# EAGLE board os31_master (EAGLE 7.7.0)
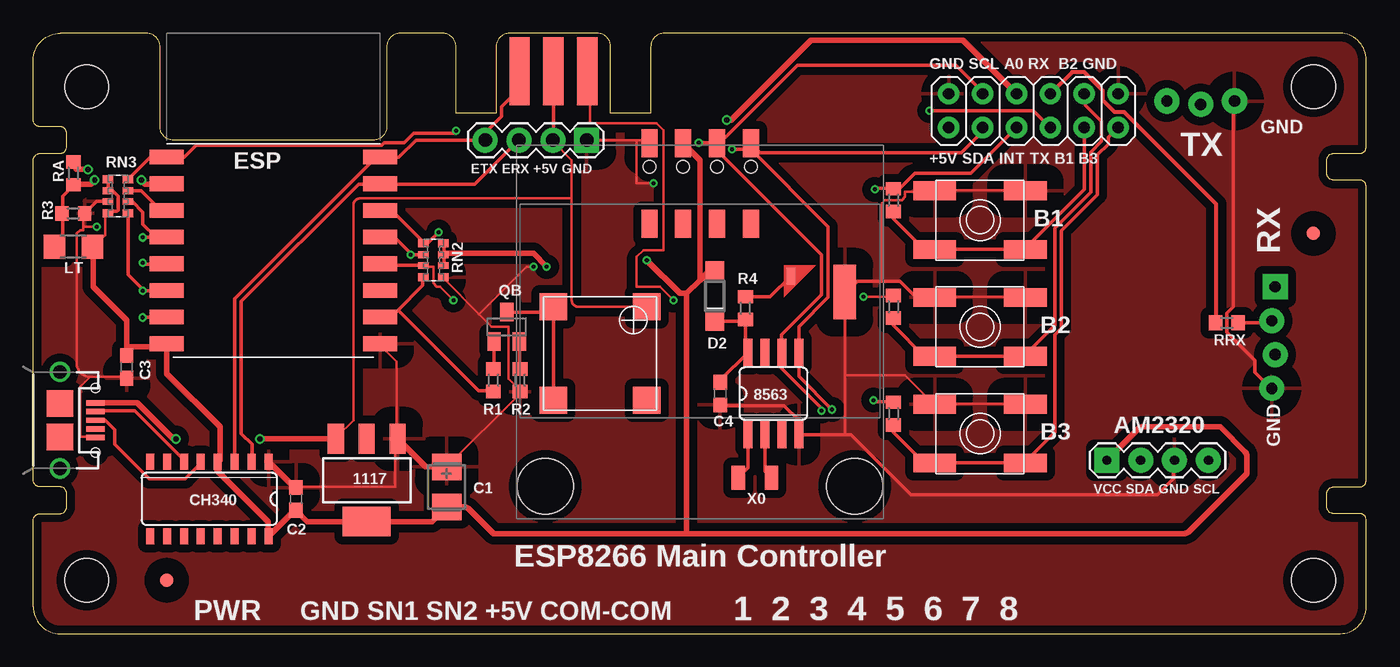
[diagram p0: board, top side]
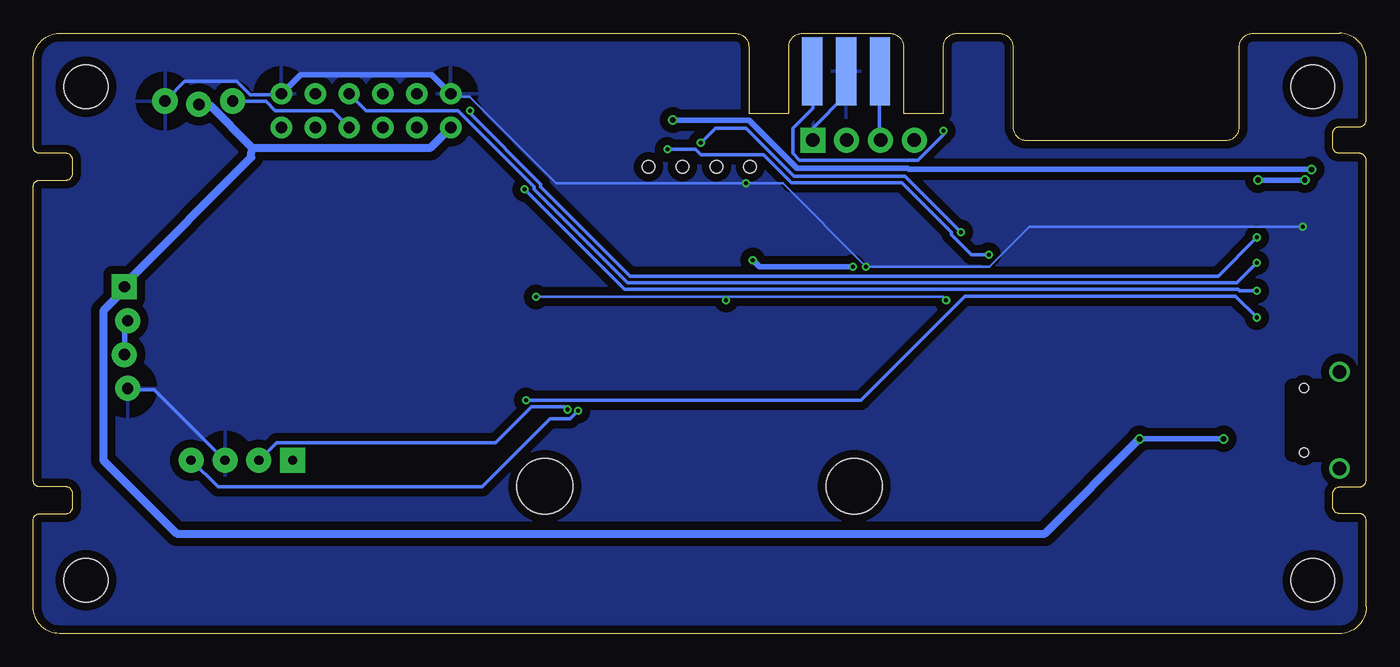
[diagram p1: board, bottom side, seen from below]

Size 99.95 x 45 mm. Coordinates in mm from the lower left corner, seen from the top.
Outline: 2,0 98,0 arc90 99.95,2 99.95,8.5 arc90 99.5,9 97.5,9 arc-90 97,9.5 97,10.5 arc-90 97.5,11 99.5,11 arc90 99.95,11.5 99.95,33.5 arc90 99.5,34 97.5,34 arc-90 97,34.5 97,35.5 arc-90 97.5,36 99.5,36 arc90 99.95,36.5 99.95,43 arc90 98,45 47.3,45 arc90 46.3,44 46.3,39 43.3,39 43.3,44 arc90 42.3,45 35.7,45 arc90 34.7,44 34.7,39 31.7,39 31.7,44 arc90 30.7,45 27.5,45 arc90 26.5,44 26.5,38 arc-90 25.5,37 10.5,37 arc-90 9.5,38 9.5,44 arc90 8.5,45 2,45 arc90 0,43 0,38.5 arc90 0.5,38 2,38 arc-90 2.5,37.5 2.5,36.5 arc-90 2,36 0.5,36 arc90 0,35.5 0,11.5 arc90 0.5,11 2,11 arc-90 2.5,10.5 2.5,9.5 arc-90 2,9 0.5,9 arc90 0,8.5 0,2 arc90 2,0
Copper layers (1*16): Top 0.035mm / dielectric 1.5mm / Bottom 0.035mm
Design rules "Fusion_eagle_rule_v1.1 *": minimum track width 6mil, minimum drill 12mil, track to track 6mil, track to pad 6mil, pad to pad 6mil, via to via 6mil, smd to smd 0mil, copper to edge 10mil, drill to drill 10mil, minimum pad ring 10mil, minimum via ring 6mil, stop-mask expansion 2mil, vias tented up to drill 100mil, thermal gap 50mil
Net classes: 0 default: width 0.203 mm, clearance 0.178 mm; 1 power: width 0.203 mm, clearance 0.178 mm; 2 relaypower: width 0.203 mm, clearance 0.178 mm; 3 signal: width 0.203 mm, clearance 0.178 mm; 4 adc: width 0.406 mm, clearance 0.178 mm
Holes 3.3 mm at 4,4 96,4 4,41 96,41
bRestrict: area 3.5,13.5 to 5.5,18.5
vRestrict: area 11,20.5 to 25,36.5

## Footprints (pad centres in the part's own frame; a part is rotated, then mirrored left to right if it is on the bottom)
FIDUCIAL_1MM = smd 1 x 1: 1 0,0
SOT223 = smd 1.219 x 2.235: 1 -2.311,-3.099; 2 0,-3.099; 3 2.311,-3.099 | smd 3.6 x 2.2: 4 0,3.099
SO08 = smd 0.66 x 2.032: 1 -1.905,-3.073; 2 -0.635,-3.073; 3 0.635,-3.073; 4 1.905,-3.073; 5 1.905,3.073; 6 0.635,3.073; 7 -0.635,3.073; 8 -1.905,3.073
1X04-NARROW = drill 0.7 pad 1.88 square: 1 0,0 | drill 0.7 pad 1.88: 2 2.54,0; 3 5.08,0; 4 7.62,0
EVQ-Q2 = smd 3.2 x 1.4: 1 -3.4,-2.2; 2 3.4,-2.2; 3 -3.4,2.2; 4 3.4,2.2
BATTCON_XH414 = smd 4.1 x 1.7: P$1 0.7,-1.85 | smd 1.27 x 0.635: P$2 1.9,2.2
SMT-8585-BUZZER = smd 2.05 x 2.05: + -3.5,-3.5; - 3.5,-3.5; A- 3.5,3.5; NC1 -3.5,3.5
CT3528 = smd 2 x 2.2: + -1.5,0; - 1.5,0
C0603 = smd 1.1 x 1: 1 -0.85,0; 2 0.85,0
SO16 = smd 0.6 x 1.2: 1 -4.445,-2.8; 2 -3.175,-2.8; 3 -1.905,-2.8; 4 -0.635,-2.8; 5 0.635,-2.8; 6 1.905,-2.8; 7 3.175,-2.8; 8 4.445,-2.8; 9 4.445,2.8; 10 3.175,2.8; 11 1.905,2.8; 12 0.635,2.8; 13 -0.635,2.8; 14 -1.905,2.8; 15 -3.175,2.8; 16 -4.445,2.8
SOD123 = smd 1.4 x 1.4: A 1.9,0; C -1.9,0
ESP12_WES = smd 2.54 x 1.1: 0 8,-3.27; 2 8,-5.27; 4 8,0.73; 5 8,-1.27; 12 -8,-5.27; 13 -8,-7.27; 14 -8,-3.27; 15 8,-7.27; 16 -8,-1.27; ADC -8,2.73; EN -8,0.73; GND 8,-9.27; RST -8,4.73; RX 8,2.73; TX 8,4.73; VCC -8,-9.27
2X06 = drill 0.85 pad 1.6: 1 -6.35,-1.27; 2 -6.35,1.27; 3 -3.81,-1.27; 4 -3.81,1.27; 5 -1.27,-1.27; 6 -1.27,1.27; 7 1.27,-1.27; 8 1.27,1.27; 9 3.81,-1.27; 10 3.81,1.27; 11 6.35,-1.27; 12 6.35,1.27
1X04 = drill 1.016 pad 1.88 square: 1 0,0 | drill 1.016 pad 1.88: 2 2.54,0; 3 5.08,0; 4 7.62,0
SSD1306_OLED_I2C_SMD3 = smd 1.2 x 2.1: 1 -3.81,1.75; 1' -3.81,-4.29; 2 -1.27,1.75; 2' -1.27,-4.29; 3 1.27,1.75; 3' 1.27,-4.29; 4 3.81,1.75; 4' 3.81,-4.29 | hole 4.2: 11.6,-23.95; -11.6,-23.95 | hole 0.95: -3.81,-0.01; -1.27,-0.01; 1.27,-0.01; 3.81,-0.01
R1206 = smd 1.6 x 1.803: 1 -1.422,0; 2 1.422,0
SOT23 = smd 1 x 1.4: 1 -0.95,-1.1; 2 0.95,-1.1; 3 0,1.1
R0603 = smd 1 x 1.1: 1 -0.85,0; 2 0.85,0
EXB38V = smd 0.6 x 0.8: 1 -1.275,-0.75; 4 1.275,-0.75; 5 1.275,0.75; 8 -1.275,0.75 | smd 0.5 x 0.8: 2 -0.4,-0.75; 3 0.4,-0.75; 6 0.4,0.75; 7 -0.4,0.75
1X04_LOCK = drill 0.85 pad 1.88 square: 1 0,0.127 | drill 0.85 pad 1.88: 2 2.54,-0.127; 3 5.08,0.127; 4 7.62,-0.127
1X03_LOCK = drill 0.85 pad 1.88: 1 0,0.127; 2 2.54,-0.127; 3 5.08,0.127
GOLDFINGER_2X3 = smd 1.524 x 5.08: 1 -2.54,-2.54; 2 0,-2.54; 3 2.54,-2.54 | smd 1.524 x 5.08 bottom: 4 -2.54,-2.54; 5 0,-2.54; 6 2.54,-2.54
USB-MICROB2 = smd 0.4 x 1.4: D+ 0,2.65; D- -0.65,2.65; GND 1.3,2.65; ID 0.65,2.65; VBUS -1.3,2.65 | drill 1: MT1 -3.625,0; MT2 3.625,0 | smd 2 x 2: MT3 1.25,0; MT4 -1.25,0 | hole 0.7: -2.425,2.65; 2.425,2.65
MM20SS1 = smd 1.8 x 1: 1 0,-1.25; 4 0,1.25

## Placement (x,y rotation side)
1F  FIDUCIAL  [FIDUCIAL_1MM]  96,30 0 top
2F  FIDUCIAL  [FIDUCIAL_1MM]  10,4 0 top
1117  BL1117-33  [SOT223]  25,11.5 180 top
8563  PCF8563  [SO08]  55.5,18 0 top
AM2320  [1X04-NARROW]  80.5,13 0 top
B1  SPST_TACTEVQQ2  [EVQ-Q2]  71,31 0 top
B2  SPST_TACTEVQQ2  [EVQ-Q2]  71,23 0 top
B3  SPST_TACTEVQQ2  [EVQ-Q2]  71,15 0 top
BAT  XH414  [BATTCON_XH414]  59,24.9 90 top
BUZ  BUZZER  [SMT-8585-BUZZER]  42.5,21 180 top
C1  100uF  [CT3528]  31,11 270 top
C2  0.1u  [C0603]  19.7,10.1 270 top
C3  0.1u  [C0603]  7,20 270 top
C4  0.1u  [C0603]  51.5,18 270 top
CH340  CH340C  [SO16]  13.2,10.1 180 top
D2  LL4148  [SOD123]  51.1,25.3 90 top
ESP  ESP-12N  [ESP12_WES]  18,31 0 top
JP1  M04X2  [2X06]  75,39.2 0 top
JP2  [1X04]  41.5,37 180 top
LCD  SSD1306_OLED_I2CSMD3  [SSD1306_OLED_I2C_SMD3]  50,35 0 top
LT  100K  [R1206]  3,29 0 top
QB  MMBT3904  [SOT23]  35.5,23 0 top
R1  1K  [R0603]  34.5,19 90 top
R2  10  [R0603]  36.5,19 90 top
R3  10K  [R0603]  3,31.5 0 top
R4  10K  [R0603]  53.4,24.4 270 top
RA  1  [R0603]  3,34.5 270 top
RB1  1  [R0603]  64.5,32.5 90 top
RB2  1  [R0603]  64.5,24.5 90 top
RB3  1  [R0603]  64.5,16.5 90 top
RN2  1Kx4  [EXB38V]  30,28 270 top
RN3  10Kx4  [EXB38V]  6.35,32.8 270 top
RRX  1K  [R0603]  89.5,23.3 180 top
RX  [1X04_LOCK]  93,26 270 top
TX  [1X03_LOCK]  85,39.8 0 top
U$3  GOLDFINGER_2X3  [GOLDFINGER_2X3]  39,44.7 0 top
USB  USBMICROB2  [USB-MICROB2]  2,16 270 top
X0  32.768kHz  [MM20SS1]  54.1,11.7 270 top

## Library data of the parts
1F 2F R1-R4 RA RRX = adafruitGood
1117 AM2320 RX TX = SparkFun
8563 BUZ C2-C4 = adafruit
B1-B3 = adafruit_3
BAT CH340 JP2 U$3 USB = SparkFunNew
C1 = resistor
D2 = diode
ESP = JeeParts
JP1 = pinhead
LCD LT RB1-RB3 = adafruit2013
QB = transistor-small-signal
RN2 RN3 = resistor-dil; OC_FARNELL: unknown; OC_NEWARK: unknown
X0 = crystal

## Nets
ADC: ESP.ADC LT.1 R3.1 RA.2
B1: B1.1 B1.2 JP1.9 RB1.1
B2: B2.1 B2.2 JP1.10 RB2.1
B3: B3.1 B3.2 JP1.11 RB3.1
D+: CH340.5 USB.D+
D-: CH340.6 USB.D-
EN: ESP.EN RN3.7
ERX: CH340.2 ESP.RX JP2.3 U$3.4
ETX: CH340.3 ESP.TX JP2.4 U$3.1
GND [power]: 1117.1 8563.4 AM2320.3 B1.3 B1.4 B2.3 B2.4 B3.3 B3.4 BAT.P$1 C1.+ C2.1 C3.2 C4.2 CH340.1 ESP.GND JP1.2 JP1.12 JP2.1 LCD.1 R2.1 R3.2 RN2.5 RN3.3 RX.4 TX.3 U$3.5 USB.GND
GPIO0: ESP.0 RB2.2 RN2.3 U$3.3
GPIO2: ESP.2
GPIO12: ESP.12 JP1.5 RB1.2 RN3.5
GPIO13: ESP.13 RB3.2
GPIO14: ESP.14 JP1.8 RRX.2
GPIO15: ESP.15 R1.1 RN2.4
GPIO16: ESP.16 JP1.7 RN3.6 TX.1
N$1: 8563.1 X0.1
N$2: BUZ.- BUZ.A- QB.3
N$7: QB.1 R1.2
N$8: QB.2 R2.2
N$9 [adc]: JP1.6 RA.1
N$11: 8563.8 C4.1 D2.C R4.2
N$26: RRX.1 RX.2 RX.3
N$30: 8563.2 X0.4
N$36: BAT.P$2 R4.1
RST: ESP.RST RN3.8 U$3.6
SCL: 8563.6 AM2320.4 ESP.4 JP1.4 LCD.3 RN2.1
SDA: 8563.5 AM2320.2 ESP.5 JP1.3 LCD.4 RN2.2
VBAT: 8563.3
VCC: 1117.4 AM2320.1 C1.- C2.2 C3.1 CH340.4 CH340.16 D2.A ESP.VCC LCD.2 LT.2 RN2.6 RN2.7 RN2.8 RN3.1 RN3.2 RN3.4
VIN: 1117.3 BUZ.+ JP1.1 JP2.2 RX.1 TX.2 U$3.2 USB.VBUS

## Tracks (layer width: path | path; a pad name or v marks a point on that pad's centre or on a via)
ADC  (via drill 0.41)
  Top 0.254: 2.2,31.5 2.2,32.8 3,33.6 RA.2 | 2.2,31.5 R3.1 | 2.2,31.5 2.2,29.62 LT.1
  Top 0.406: v8.1,34 8.4,33.7 10,33.7 ESP.ADC | v4.6,34 4.3,33.7 3.1,33.7 RA.2
  Bottom 0.406: v4.6,34 v8.1,34
B1
  Top 0.254: RB1.1 64.5,31.1 66.8,28.8 B1.1 B1.2 74.4,28.9 78.8,33.3 78.8,37.9 JP1.9
B2
  Top 0.254: RB2.1 64.5,23.1 66.8,20.8 B2.1 B2.2 74.4,20.9 76.6,23.1 76.6,30.4 79.3,33.1 79.3,36.1 80.1,36.9 80.1,38.4 78.9,39.6 78.9,40.4 JP1.10
B3
  Top 0.254: RB3.1 64.5,15.1 66.8,12.8 B3.1 B3.2 74.4,12.9 76.6,15.1 76.6,22.4 77.1,22.9 77.1,30.2 79.8,32.9 79.8,35.9 80.6,36.7 80.6,37.2 81.3,37.9 JP1.11
D+
  Top 0.254: USB.D+ 5.4,16 6.1,15.3 6.1,14.2 8.7,11.6 11.4,11.6 12.6,12.8 12.6,12.9 CH340.5
D-
  Top 0.254: CH340.6 11.3,13 7.6,16.7 4.7,16.7 USB.D-
EN
  Top 0.254: RN3.7 8.1,33.2 9.6,31.7 10,31.7 ESP.EN
ERX
  Top 0.254: CH340.2 16.4,12.9 16.4,14.2 15.6,15 15.6,24.9 24.4,33.7 26,33.7 ESP.RX 26.1,33.7 33.1,33.7 36.4,37 JP2.3
  Bottom 0.254: JP2.3 36.5,37 36.5,42.1 U$3.4
ETX
  Top 0.254: U$3.1 36.5,42.1 36.5,40.9 35.1,39.5 35.1,38.8 33.9,37.6 33.9,37 JP2.4 28.7,37 27.4,35.7 26.1,35.7 ESP.TX 26,35.7 25.7,35.7 15.1,25.1 CH340.3
GND  (via drill 0.3)
  Top 0.203: B1.4 74.38,33.25 67.62,33.25 B1.3 67.5,33.12 65.38,33.12 65.38,32.75 65.12,32.5 63.88,32.5 63.62,32.25 63.62,26.4 | B3.4 74.38,17.25 67.62,17.25 B3.3 67.5,17.25 65.38,19.38 60.88,19.38 | B2.4 74.38,25.25 67.62,25.25 B2.3 | 60.88,14.9 60.88,19.38 | 60.88,19.38 60.88,25.38 BAT.P$1 | C2.1 19.88,11 27.12,11 27.12,14.5 1117.1 27.25,14.75 27.25,20.38 26,21.62 ESP.GND | 33.44,23.94 34.38,23 35.62,23 35.62,19.12 36.5,18.25 R2.1 | 33.44,23.94 30.75,26.62 RN2.5 | 36.5,18.12 R2.1 | 4.25,19.25 7,19.25 C3.2 | 4.25,19.25 3.5,18.5 3.5,14.75 4.5,14.75 USB.GND | 3.75,30.5 3.75,30.25 3.5,30.25 3.25,30 3.25,20.25 arc90 4.25,19.25 | 3.75,30.5 3.75,31.5 R3.2 | C1.+ 36.5,18 R2.1 | JP2.1 45.25,37 | 45.25,37 45.75,37 46,36.75 LCD.1 | 45.25,37 45.25,33.75 v46.5,33.75 | 33.44,23.94 37,27.5 v37.5,27.5 | v4.75,30.5 3.75,30.5
  Top 0.254: C4.2 51.5,17.1 56.3,17.1 57.4,16 57.4,15 8563.4 57.5,14.9 60.88,14.9 61.3,14.9 65.8,10.4 84.3,10.4 85.5,11.6 85.5,13 AM2320.3 | RX.4 92.8,18.4 91.6,19.6 91.6,20.5 89.5,22.6 89.5,24 90,24.5 90,39.9 TX.3 | B2.3 66.2,25.2 65,26.4 63.62,26.4 61.8,26.4 60.9,25.5 60.8,25.6 BAT.P$1 | RN3.3 4.75,32.4 R3.2
  Top 0.406: C1.+ 29.41,12.5 1117.1 | C2.1 19.59,10.95 CH340.1
  Bottom 0.203: JP1.2 68.5,40.25 67.25,40.25 60.75,33.75 v46.5,33.75 43.75,33.75 v37.5,27.5 28.25,27.5 25.25,30.5 v4.75,30.5
  Bottom 0.254: JP2.1 41.5,37.9 39,40.4 U$3.5 | JP1.12 81.4,40.4 83.7,40.4 84.7,41.4 88.6,41.4 90,40 TX.3 | RX.4 92.8,18.3 90.9,18.3 85.6,13 AM2320.3
  Bottom 0.406: JP1.12 81.3,40.5 79.9,41.9 70.1,41.9 68.7,40.5 JP1.2
  pour Top (isolate 0.61): 0,45 100,45 100,0 0,0
  pour Bottom (isolate 0.61): 0,45 100,45 100,0 0,0
GPIO0  (via drill 0.3)
  Top 0.203: v62.25,25.25 64.5,25.25 RB2.2 | v31.5,25 30.5,26 30.25,26 30,26.25 30,27.5 29.25,27.5 RN2.3 | v48,25 47,26 45.25,26 45.25,28.25 45.75,28.75 47.25,28.75 47.25,37.75 46.75,38.25 41.75,38.25 41.75,42 U$3.3
  Top 0.254: RN2.3 26.13,27.6 ESP.0
  Bottom 0.203: 48,25.25 31.75,25.25 v31.5,25 | 48,25.25 v62.25,25.25 | 48,25.25 v48,25
GPIO12  (via drill 0.3)
  Top 0.254: JP1.5 70.3,34.5 66.1,34.5 65,33.4 64.5,33.4 RB1.2 64.4,33.4 63.2,33.4 v63.1,33.3 | ESP.12 10,25.7 v8.2,25.7 8.2,25.8 7.1,26.9 RN3.5
  Bottom 0.254: v8.2,25.7 9.5,25.7 9.6,25.8 55.6,25.8 v63.1,33.3
GPIO13  (via drill 0.3)
  Top 0.254: v63,17.5 63.1,17.4 64.5,17.4 RB3.2 | v8.2,23.7 10,23.7 ESP.13
  Bottom 0.254: v8.2,23.7 9.8,25.3 30.1,25.3 37.9,17.5 v63,17.5
GPIO14  (via drill 0.3)
  Top 0.254: v8.2,27.8 8.3,27.7 10,27.7 ESP.14
  Top 0.305: RRX.2 88.7,23.3 88.7,32.2 81.8,39.1 81.1,39.1 80.2,40 80.2,40.7 78.8,42.1 77.9,42.1 JP1.8
  Bottom 0.254: v8.2,27.8 9.7,26.3 55.4,26.3 62.4,33.3 62.4,33.5 68.1,39.2 75,39.2 JP1.8
GPIO15
  Top 0.254: 27.35,24.25 26.8,23.7 26,23.7 ESP.15 | 27.35,24.25 29.2,26.1 29.2,26.7 RN2.4 | 27.35,24.25 33.4,18.2 34.5,18.2 R1.1
GPIO16  (via drill 0.3)
  Top 0.254: RN3.6 7.4,32.4 8.2,31.6 8.2,30.7 9.2,29.7 10,29.7 ESP.16 8.9,29.9 8.7,29.7 v8.2,29.7 | v67.2,39.2 75,39.2 JP1.7
  Bottom 0.254: v8.2,29.7 11.1,26.8 55.2,26.8 61.9,33.5 61.9,33.7 67.2,39 v67.2,39.2 | TX.1 85,39.9 82.5,39.9 81.8,39.2 77.5,39.2 76.3,38 JP1.7
N$1
  Top 0.254: 8563.1 53.59,12.45 X0.1
N$2
  Top 0.254: QB.3 38.6,24.1 BUZ.- BUZ.A-
N$7
  Top 0.254: QB.1 34.55,19.9 R1.2
N$8
  Top 0.254: QB.2 36.45,19.9 R2.2
N$9  (via drill 0.41)
  Top 0.406: v4.1,34.8 3.3,34.8 | 3.3,34.8 3.2,34.8 | v52,38.5 52.3,38.5 58.3,44.5 69.7,44.5 JP1.6 | RA.1 3,35.3 3.3,35 3.3,34.8
  Bottom 0.406: v4.1,34.8 34.3,34.8 34.4,34.9 42.7,34.9 46.3,38.5 v52,38.5
N$11
  Top 0.254: C4.1 51.5,18.98 8563.8 53.4,21.27 R4.2 53.25,23.4 D2.C
N$26
  Top 0.254: RRX.1 92.71,23.3 RX.2
  Bottom 0.406: RX.3 93.1,21 93.1,23.2 92.9,23.4 RX.2
N$30
  Top 0.254: 8563.2 54.87,12.19 X0.4
N$36
  Top 0.254: R4.1 55.25,25.25 BAT.P$2
RST  (via drill 0.3)
  Top 0.254: RN3.8 8.76,35.73 ESP.RST 10.1,35.7 11.3,35.7 12.2,36.6 26.1,36.6 26.3,36.8 27.8,36.8 28.5,37.5 31.6,37.5 31.6,37.6 v31.7,37.7
  Bottom 0.254: v31.7,37.7 31.7,37.4 33.6,35.5 42.5,35.5 43,36 43,37.9 41.5,39.4 41.5,42.1 U$3.6
SCL  (via drill 0.3)
  Top 0.254: 29.2,29.3 RN2.1 | LCD.3 51.3,36.7 51.3,36.2 59.1,28.4 59.1,25.4 56.1,22.4 56.1,21.1 8563.6 56.1,21 56.1,19.9 59.1,16.9 v59.1,16.7 | RN2.1 29.2,29.4 26.9,31.7 26,31.7 ESP.4 | v49.9,36.8 51.2,36.8 LCD.3 | v30.4,30.1 29.6,29.3 29.3,29.3 RN2.1 | JP1.4 71.19,40.61 69.2,42.6 57.3,42.6 51.9,37.2 51.72,37.2 LCD.3
  Bottom 0.254: v49.9,36.8 48.8,37.9 46.5,37.9 42.9,34.3 34.6,34.3 v30.4,30.1 | AM2320.4 88.1,13 86.1,11 66.3,11 61.2,16.1 59.7,16.1 v59.1,16.7
SDA  (via drill 0.3)
  Top 0.254: RN2.2 28.4,28.4 28.35,28.45 | 28.35,28.45 27.1,29.7 26,29.7 ESP.5 | LCD.4 53.8,36.7 53.8,36.3 59.6,30.5 59.6,25.2 57.4,23 57.4,21.1 8563.5 57.4,21 57.4,19.3 v59.9,16.8 | v52.4,36.3 53.7,36.3 LCD.4 | v28.3,28.4 28.35,28.45 | JP1.3 71.19,37.64 69.6,36.05 54.51,36.05 LCD.4
  Bottom 0.254: v59.9,16.8 60.1,17 62.6,17 65.3,14.3 81.7,14.3 83,13 AM2320.2 | v52.4,36.3 50.3,36.3 49.9,35.9 45.2,35.9 43.1,33.8 34.8,33.8 31.1,30.1 31.1,29.9 29.6,28.4 v28.3,28.4
VCC  (via drill 0.3)
  Top 0.203: 4.5,29 5.38,29.88 5.38,31.38 RN3.4
  Top 0.254: RN2.8 30.8,29.2 30.8,28.4 RN2.7 30.8,28.3 30.8,27.6 RN2.6 | RN3.1 RN3.2 5.95,33.2 6.35,32.8 6.35,31.75 6.25,31.65 5.72,31.65 RN3.4
  Top 0.406: C3.1 7,21.5 | 7,21.5 7,23.5 4.5,26 4.5,29 LT.2 | 10,21.5 10,19.5 14,15.5 14,13 CH340.4 13.8,12.9 13.8,12.2 17.6,8.4 17.6,7.5 CH340.16 19.59,9.25 C2.2 20.55,8.4 1117.4 29.9,8.4 C1.- 32.29,9.5 arc-45 32.65,9.35 34.5,7.5 49,7.5 | 7,21.5 10,21.5 | 10,21.5 ESP.VCC | 49,7.5 86.29,7.5 arc45 86.65,7.65 91,12 91,13.29 arc45 90.85,13.65 89,15.5 83.21,15.5 arc45 82.85,15.35 AM2320.1 | 49,25.5 49,7.5 | 50,26.5 51,27.5 D2.A | 50,26.5 49,25.5 | 50,26.5 50,35.5 49,36.5 LCD.2 | 49,25.5 48.5,25.5 v46,28 | v38.5,27.5 37.5,28.5 31,28.5 RN2.7
  Bottom 0.406: v46,28 45.5,27.5 v38.5,27.5
VIN  (via drill 0.41)
  Top 0.203: 40.38,32.62 40.38,25 arc90 40.88,24.5 BUZ.+ | 40.38,32.62 40.38,35.5 39,36.88 JP2.2 | 40.38,32.62 24.5,32.62 arc90 24,32.12 24,16 22.75,14.75 1117.3
  Top 0.254: U$3.2 39,37 JP2.2
  Top 0.406: v17,14.6 22.6,14.6 1117.3 | v10.7,14.6 10.5,14.6 7.8,17.3 USB.VBUS
  Bottom 0.406: v10.7,14.6 v17,14.6
  Bottom 0.61: v17,14.6 24.1,7.5 89.2,7.5 94.7,13 94.7,24.2 93.13,25.77 RX.1 93,26.3 83.6,35.7 83.6,36.1 83.5,36.4 | 83.5,36.4 86.7,39.6 87.5,39.6 TX.2 | 83.5,36.4 70.2,36.4 68.7,37.9 JP1.1

## Text on the board
tNames: GND SCL A0 RX B2 GND | GND | +5V SDA INT TX B1 B3 | ETX ERX +5V GND | GND | VCC SDA GND SCL | ESP8266 Main Controller | PWR | GND SN1 SN2 +5V COM-COM | 1 2 3 4 5 6 7 8